# Altium PCB MCU48PIN.PcbDoc
Units mm, origin at the board's own origin, x right, y up, seen from the top; angles counter-clockwise.
Board outline 63.12 x 33.27 mm, 2 copper layers (Top Layer, Bottom Layer); 49 components, 63 nets, 196 pads, 55 vias.
Unrouted connection lines stored in the file: 13.
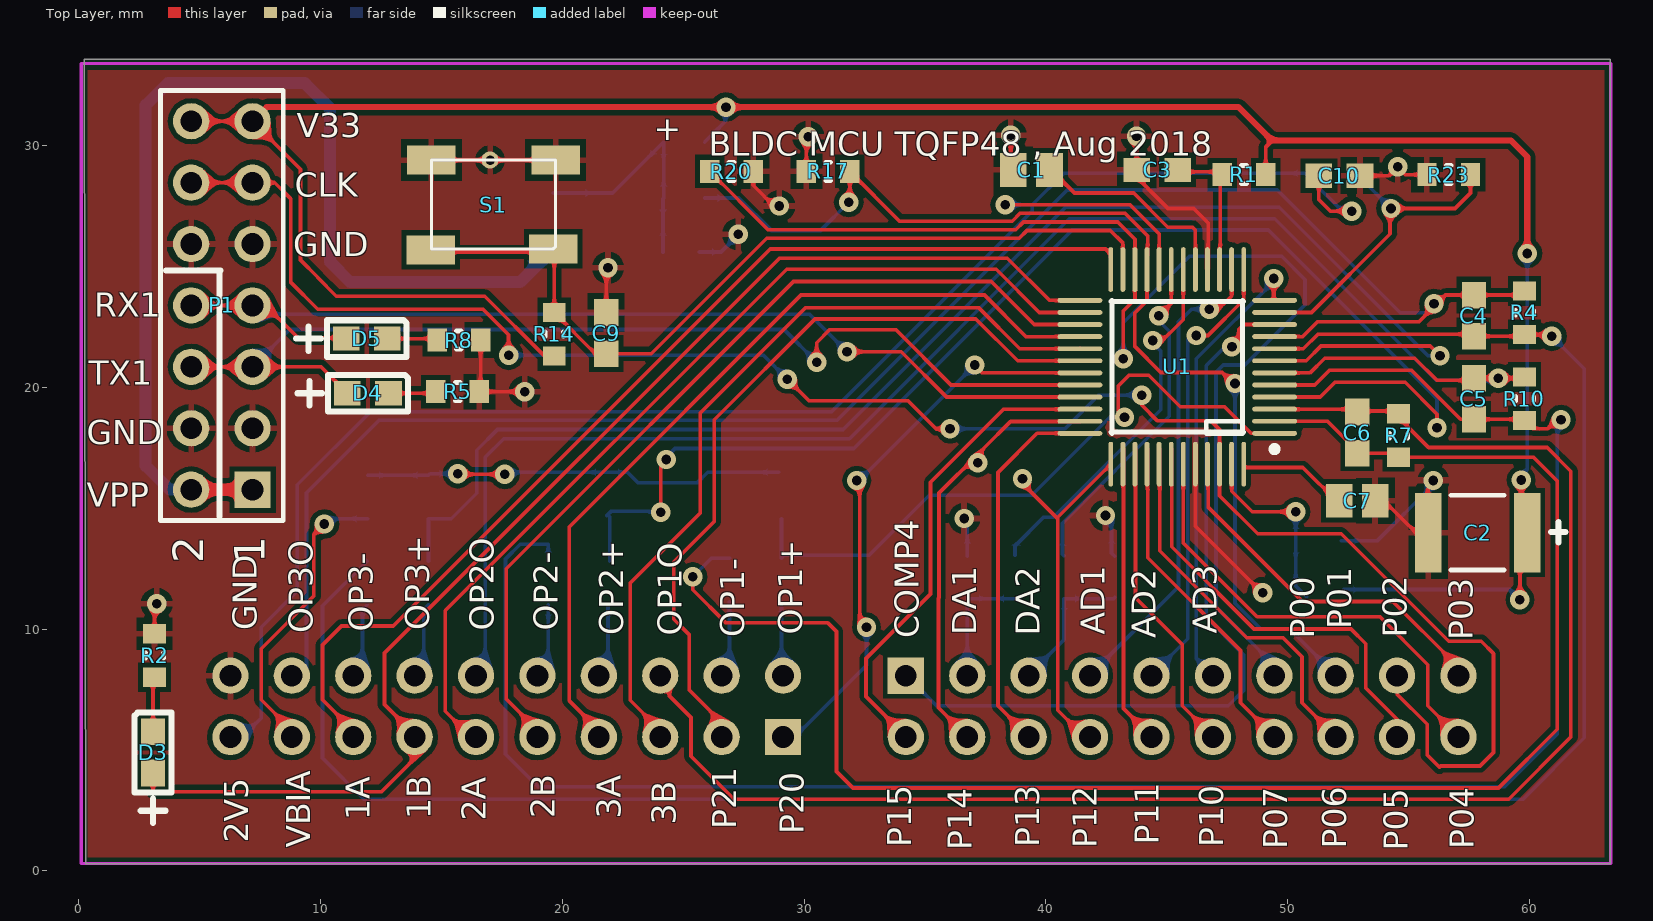
[diagram p0: Top Layer view]
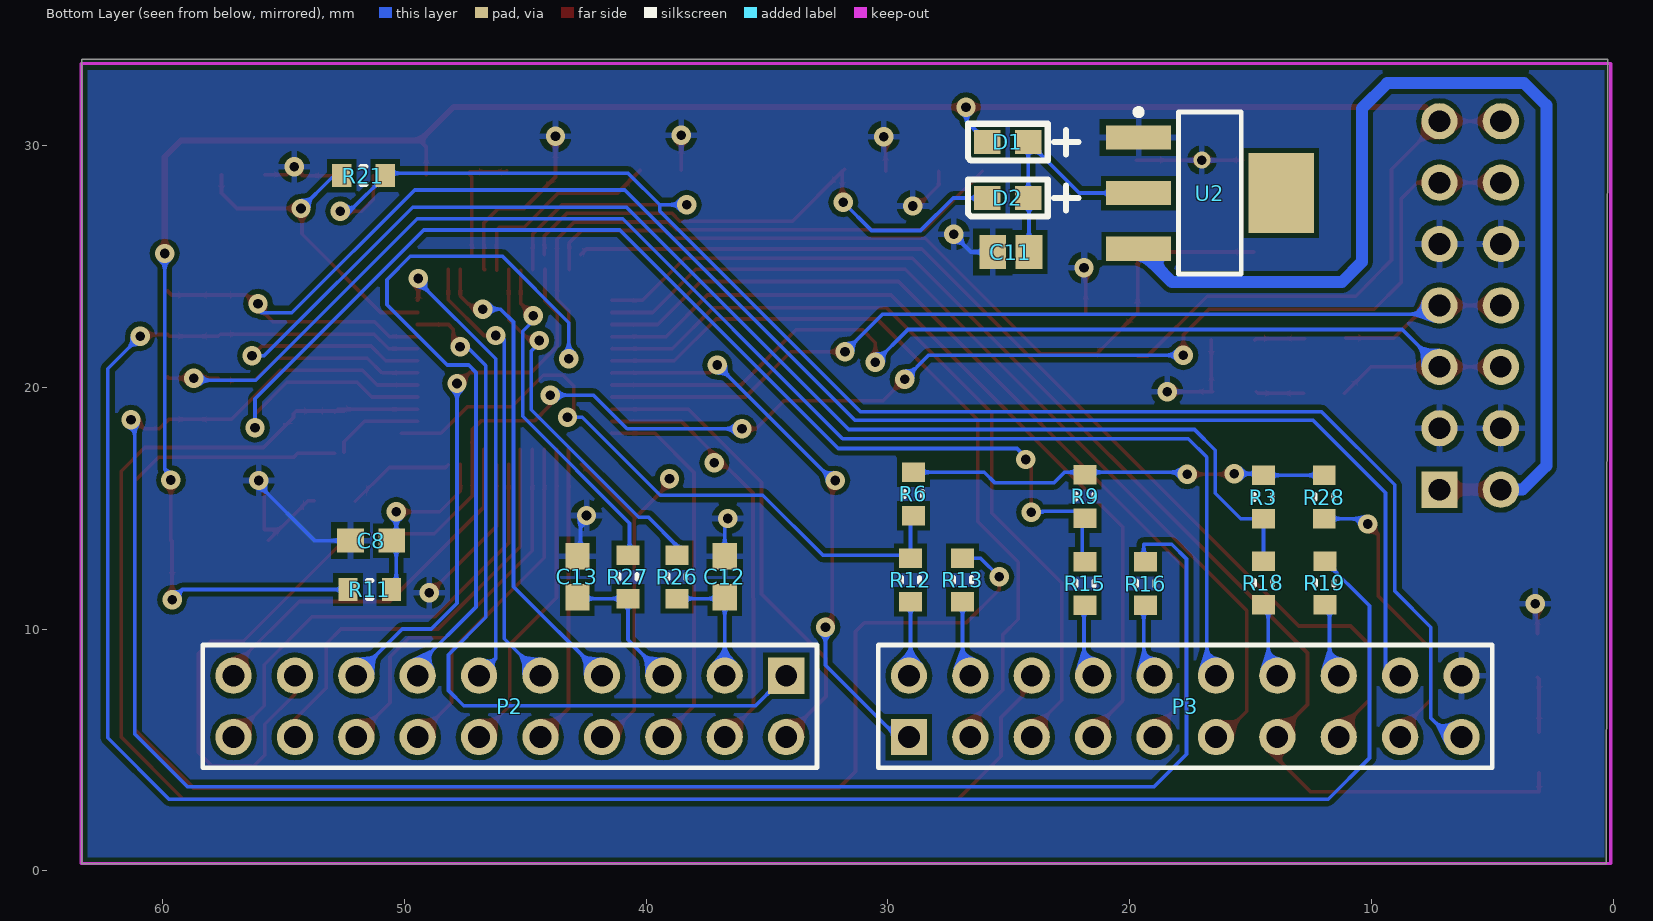
[diagram p1: Bottom Layer view, seen from below]

## Layer stack, top to bottom
Top Solder: solder mask 0.0102, Solder Resist, Dk 3.5
Top Layer: signal copper 0.0356
Dielectric1: dielectric 0.32, FR-4, Dk 4.8
Bottom Layer: signal copper 0.0356
Bottom Solder: solder mask 0.0102, Solder Resist, Dk 3.5

## Board outline
0.229,33.579 63.348,33.579 63.348,0.305 0.279,0.305

## Design rules (kind name [scope] priority, off if disabled: settings)
Clearance [All] p1: gap=0.203 ignorepadtopadclearanceinfootprint=FALSE
FabricationTestPointUsage TestPointUsage [All] p1: valid=0 allowmultiple=FALSE
FabricationTestpoint Testpoint [All] p1: side=3 testpointundercomponent=TRUE minsize=1.016 maxsize=2.54 preferedsize=1.524 minholesize=0 maxholesize=1.016 preferedholesize=0.813 testpointgrid=0.025 allowsidetop=TRUE allowsidebottom=TRUE usegrid=TRUE gridtolerance=0
PolygonConnect [All] p1: connectstyle=Relief reliefconductorwidth=0.254 reliefentries=4 polygonreliefangle="90 Angle" airgapwidth=0.254
RoomDefinition MCU48pin [InComponentClass('MCU48pin')] p1: confinementstyle=ConfineIn formatcopy=TRUE lockcomponents=FALSE outline 0.203,0.305 63.551,0.305 63.551,33.579 0.203,33.579
RoutingVias [All] p1: holewidth=0.4 width=0.8 viastyle="Through Hole" minholewidth=0.4 minwidth=0.8 maxholewidth=0.711 maxwidth=1.27
SilkToSolderMaskClearance SilkscreenOverComponentPads [IsPad] p1: minsilkscreentomaskgap=0.254 clearancetoexposedcopper=TRUE
SolderMaskExpansion [All] p1: expansion=0.102
Width [All] p1: maxlimit=0.508 minlimit=0.152 preferedwidth=0.152 minimp=50.000000 maximp=50.000000 favimp=50.000000
27 further rules are at their usual default settings.

## Components (designator, comment, footprint, x,y, rotation, side; value= is the part's Value field where it differs from the comment)
C1 "4.7u" C0805 39.407,29 r0 top
C2 "Tan-cap" R1206w 57.869,13.487 r180 top value=100uF
C3 "0.1u" 1608[0603] 44.607,29 r180 top
C4 "NC" 1608[0603] 57.709,22.973 r270 top
C5 "NC" 1608[0603] 57.709,19.533 r270 top
C6 "NC" 1608[0603] 52.883,18.136 r270 top
C7 "4.7u" C0805 52.883,15.316 r180 top
C8 "0.1u" 1608[0603] 51.384,13.665 r0 bottom
C9 "4.7U" 1608[0603] 21.819,22.25 r90 top
C10 "0.1u" 1608[0603] 52.149,28.76 r0 top
C11 "4.7u" C0805 24.917,25.603 r180 bottom
C12 "150p" 1608[0603] 36.754,12.167 r90 bottom
C13 "150p" 1608[0603] 42.85,12.167 r90 bottom
D1 "Diode 11DQ03" D0603 25.044,30.15 r0 bottom
D2 "Diode 11DQ03" D0603 25.044,27.838 r0 bottom
D3 "LED" D0603 3.073,4.902 r90 top
D4 "LED" D0603 11.963,19.761 r0 top
D5 "LED" D0603 11.913,22.022 r0 top
P1 "Header 7X2" HDR2X7 7.188,15.773 r90 top locked
P2 "Header 10X2A" HDR2X10_CEN 34.214,8.077 r0 bottom locked
P3 "Header 10X2A" HDR2X10_CEN 29.134,5.537 r180 bottom locked
R1 "FB" R0603 48.707,28.864 r270 top
R2 "10k" R0603 3.073,9.423 r0 top
R3 "1K" R0603 14.529,15.977 r180 bottom
R4 "10k" R0603 59.741,23.597 r0 top
R5 "10k" R0603 16.18,19.888 r270 top
R6 "1K" R0603 29.007,16.104 r180 bottom
R7 "10k" R0603 54.534,18.517 r0 top
R8 "10k" R0603 16.231,22.022 r270 top
R9 "1K" R0603 21.907,16 r180 bottom
R10 "10k" R0603 59.741,20.041 r0 top
R11 "FB" R0603 51.943,11.582 r90 bottom
R12 "1K" R0603 29.127,12.548 r180 bottom
R13 "1K," R0603 26.975,12.548 r180 bottom
R14 "10k" R0603 19.609,22.708 r0 top
R15 "1K" R0603 21.907,12.4 r180 bottom
R16 "1K," R0603 19.407,12.4 r180 bottom
R17 "10K" R0603 31.507,29 r270 top
R18 "1K" R0603 14.529,12.421 r180 bottom
R19 "1K," R0603 11.989,12.421 r180 bottom
R20 "10k" R0603 27.507,29 r270 top
R21 "10k" R0603 52.207,28.7 r90 bottom
R23 "10k" R0603 56.16,28.744 r90 top
R26 "15" R0603 38.786,12.675 r180 bottom
R27 "15" R0603 40.818,12.675 r180 bottom
R28 "NC" R0603 11.894,14.961 r0 bottom
S1 "SW-PB" SW 17.094,27.762 r0 top
U1 "MCU" TSSOP48 45.745,20.066 r180 top
U2 "LDO" SOT223_M 16.684,28.042 r180 bottom

## Footprints (in the part's own frame and the unit in brackets; to place one, negate y for a bottom-side part, rotate by r counter-clockwise, add the part's x,y. Pads: shape width x height; smd on the part's side, far side on the other; paste and mask are expansions set on the pad)
1608[0603] [mm] "Chip Capacitor; Body 1.6 x 0.8 mm (LxW typ)"
  rect 1.1x1 smd: 1(-0.85,0) 2(0.85,0)
C0805 [mm] "Chip Capacitor, Body 2.0x1.3mm, IPC High Density"
  rect 1.1x1.4 smd: 1(-0.75,0) 2(0.75,0)
  body extent -1.1,-0.72 1.1,0.72, height 1.4
D0603 [mm]
  rect 1.1x1 smd: 1(-0.85,0) 2(0.85,0)
  silkscreen extent -2.92,-0.76 1.65,0.76
HDR2X7 [mm] "Connector; Header; 7x2 Position"
  rect 1.5x1.5 hole 0.9: 1(0,0)
  round 1.5 hole 0.9: 2(0,2.54) 3(2.54,0) 4(2.54,2.54) 5(5.08,0) 6(5.08,2.54) 7(7.62,0) 8(7.62,2.54) 9(10.16,0) 10(10.16,2.54) 11(12.7,0) 12(12.7,2.54) 13(15.24,0) 14(15.24,2.54)
  silkscreen extent -1.27,-1.27 16.51,3.81
HDR2X10_CEN [mm] "Connector; Header; 10x2 Position"
  rect 1.5x1.5 hole 0.9: 1(0,0)
  round 1.5 hole 0.9: 2(2.54,0) 3(5.08,0) 4(7.62,0) 5(10.16,0) 6(12.7,0) 7(15.24,0) 8(17.78,0) 9(20.32,0) 10(22.86,0) 11(0,2.54) 12(2.54,2.54) 13(5.08,2.54) 14(7.62,2.54) 15(10.16,2.54) 16(12.7,2.54) 17(15.24,2.54) 18(17.78,2.54) 19(20.32,2.54) 20(22.86,2.54)
  silkscreen extent -1.27,-1.27 24.13,3.81
R0603 [mm]
  rect 0.95x0.8 smd: 1(0.06,0.392) 2(0.06,-1.408)
  silkscreen extent -0.32,-0.61 0.44,-0.41, body extent -0.39,-1.36 0.51,0.34, height 0.6
R1206w [mm]
  rect 1.1x3.3 smd: 1(-2.05,-0.508) 2(2.05,-0.508)
  silkscreen extent -1.1,-2.06 1.1,1.04, body extent -2.4,-2.21 2.4,1.19, height 0.7
SOT223_M [mm] "SOT223, 4-Leads, Body 6.5x3.5mm, Pitch 2.3mm, Lead Span 7mm, IPC Low Density"
  rect 2.7x1 smd: 1(-2.95,2.3) 2(-2.95,0) 3(-2.95,-2.3)
  rect 2.7x3.3 smd: 4(2.95,0)
  silkscreen extent -3.08,-3.35 1.3,3.47, body extent -1.85,-3.35 1.85,3.35, height 1.7
SW [mm]
  rect 2x1.2 smd: 1(-2.507,1.643) 1(2.634,1.643) 2(-2.532,-2.065) 2(2.533,-2.029)
  silkscreen extent -2.51,-2.04 2.63,1.64, body extent -2.51,-2.04 2.35,1.64, height 0.5
TSSOP48 [mm]
  oval 1.85x0.2 smd: 1(-3.72,1.963) 2(-3.72,1.463) 3(-3.72,0.963) 4(-3.72,0.463) 5(-3.72,-0.037) 6(-3.72,-0.537) 7(-3.72,-1.037) 8(-3.72,-1.537) 9(-3.72,-2.037) 10(-3.72,-2.537) 11(-3.72,-3.037) 12(-3.72,-3.537) 25(4.33,-3.537) 26(4.33,-3.037) 27(4.33,-2.537) 28(4.33,-2.037) 29(4.33,-1.537) 30(4.33,-1.037) 31(4.33,-0.537) 32(4.33,-0.037) 33(4.33,0.463) 34(4.33,0.963) 35(4.33,1.463) 36(4.33,1.963)
  oval 0.2x1.85 smd: 13(-2.445,-4.812) 14(-1.945,-4.812) 15(-1.445,-4.812) 16(-0.945,-4.812) 17(-0.445,-4.812) 18(0.055,-4.812) 19(0.555,-4.812) 20(1.055,-4.812) 21(1.555,-4.812) 22(2.055,-4.812) 23(2.555,-4.812) 24(3.055,-4.812) 37(3.055,3.238) 38(2.555,3.238) 39(2.055,3.238) 40(1.555,3.238) 41(1.055,3.238) 42(0.555,3.238) 43(0.055,3.238) 44(-0.445,3.238) 45(-0.945,3.238) 46(-1.445,3.238) 47(-1.945,3.238) 48(-2.445,3.238)
  silkscreen extent -3.85,-3.54 3.05,2.74, body extent -3.38,-4.16 3.62,2.84, height 1

## Part data
C1 C3 C4 C5 C6 C7 C8 C9 C10 C11 C12 C13: library part "CAP NP", "CAP NL", manufacturer=Yageo, part number=CC0603KRX7R9BB103, remark="C-CAP 10N 50V X7R  0603 K"
C2: library part "Cap Pol1", "Polarized Capacitor (Radial)", LatestRevisionDate=17-Jul-2002, LatestRevisionNote="Re-released for DXP Platform.", PackageReference=RB7.6-15, Published=8-Jun-2000, Publisher="Altium Limited"
D1 D2: "Schottky Rectifier", Code_JEDEC=DO-204-AL, ComponentLink1Description="Manufacturer Link", ComponentLink1URL=http://www.irf.com/, ComponentLink2Description=Datasheet, ComponentLink2URL=http://www.irf.com/product-info/datasheets/data/11dq03.pdf, DatasheetVersion=Dec-1997, LatestRevisionDate=17-Jul-2002, LatestRevisionNote="Re-released for DXP Platform.", PackageDescription="Diode, Axial; Body 5.2 x 2.7 mm (LxDia. max), Lead Dia. 0.86 mm (max)", PackageReference=DO-204AL, Published=8-Jun-2000, Publisher="Altium Limited"
D3 D4 D5: library part LED2, "Typical RED, GREEN, YELLOW, AMBER GaAs LED", LatestRevisionDate=17-Jul-2002, LatestRevisionNote="Re-released for DXP Platform.", PackageDescription="SM LED; 2 Flat Leads", PackageReference=3.2X1.6X1.1, PackageVersion=Feb-2002, Published=8-Jun-2000, Publisher="Altium Limited"
P1: "Header, 7-Pin, Dual row", LatestRevisionDate=17-Jul-2002, LatestRevisionNote="Re-released for DXP Platform.", Publisher="Altium Limited"
P2 P3: "Header, 10-Pin, Dual row", LatestRevisionDate=17-Jul-2002, LatestRevisionNote="Re-released for DXP Platform.", Publisher="Altium Limited"
R1 R2 R3 R4 R5 R6 R7 R8 R9 R10 R11 R12 R13 R14 R15 R16 R17 R18 R19 R20 R21 R23 R26 R27 R28: library part RES, "RES", manufacturer=Yageo, part number=RC0603JR-071KL, remark="RES-TF 1K  0.1W 0603 5%"
S1: "Switch", LatestRevisionDate=17-Jul-2002, LatestRevisionNote="Re-released for DXP Platform.", PackageReference=SPST-2, Published=24-Mar-1999, Publisher="Altium Limited"

## Via types
v1: diameter 0.8, hole 0.4, Top Layer to Bottom Layer, tented both sides, 54 vias
v2: diameter 0.7, hole 0.4, Top Layer to Bottom Layer, tented both sides, 1 vias

## Nets (pads, with @x,y where several pads share a name; then routed paths per layer and width w, separated by ;. In a path a pad name is that pad's centre, name@x,y a point inside that pad or via, vN(x,y) a via of type N, cw(c..) or ccw(c..) an arc to the next point about the centre after c; other vN are vias at no path point)
5V: P1.1 P1.2 U2.3 | length 44.7
  Top Layer w0.5: P1.2 P1.1
  Bottom Layer w0.5: P1.2 3.759,15.773 2.769,16.764 2.769,31.674 3.683,32.588 9.347,32.588 10.389,31.547 10.389,25.197 11.227,24.359 18.251,24.359 U2.3
AD1: P2.4 U1.14 | length 20
  Top Layer w0.152: v1(46.761,23.241) 46.952,23.05 47.691,23.789 U1.14
  Bottom Layer w0.152: P2.4@41.834,8.103 45.491,11.76 45.491,22.708 46.025,23.241 v1(46.761,23.241)
AD2: P2.5 U1.13 | length 19
  Top Layer w0.152: v1@46.406,21.971 v1(46.228,22.149) 46.711,22.149 48.191,23.629 U1.13
  Bottom Layer w0.152: P2.5@44.374,8.103 45.872,9.601 45.872,21.996 46.025,22.149 v1(46.228,22.149)
AD3: P2.6 U1.12 | length 18.9
  Top Layer w0.152: v1(49.428,24.511) 49.428,23.641 U1.12
  Bottom Layer w0.152: P2.6@46.914,8.103 46.228,8.788 46.228,21.184 49.428,24.384 v1(49.428,24.511)
AVDD25: C10.1 P3.10 R21.2 U1.20 | length 73.2
  Top Layer w0.152: v1(38.329,27.559) 43.485,27.559 44.691,26.353 U1.20 ; C10.1 51.299,27.763 51.766,27.296 v1(52.655,27.296)
  Bottom Layer w0.152: P3.10@6.655,5.436 7.544,6.325 7.544,10.084 9.042,11.582 9.042,15.971 12.07,18.999 31.14,18.999 39.446,27.305 39.446,27.559 ; v1(38.329,27.559) 39.446,27.559 ; R21.2 52.262,27.296 v1(52.655,27.296) ; R21.2@50.799,28.864 40.751,28.864 39.446,27.559
COMP4: P2.1 U1.10 | length 32.6
  Top Layer w0.152: v1(47.701,21.692) 47.981,21.971 47.981,22.403 48.181,22.603 U1.10
  Bottom Layer w0.152: P2.1@34.214,8.103 35.484,6.833 47.549,6.833 48.184,7.468 48.184,8.942 46.634,10.491 46.634,20.904 47.422,21.692 v1(47.701,21.692)
DA1/AD8: C12.1 P2.2 R26.2 | length 5.2
  Bottom Layer w0.152: P2.2@36.754,8.103 C12.1 36.804,11.267 R26.2
DA2/AD9: C13.1 P2.3 R27.2 | length 5.9
  Bottom Layer w0.152: P2.3@39.294,8.103 40.758,9.567 R27.2 42.8,11.267 C13.1
GND: C1.1 C2.2 C3.2 C7.1 C8.2 C9.2 C10.2 C11.1 C12.2 C13.2 P1.3 P1.4 P1.9 P1.10 P3.20 R2.1 R5.1 R8.1 R17.2 R20.1 R23.1 S1.1 U1.16 U1.44 U2.1 | length 49.1
  Top Layer w0.152: R2.1 3.133,10.957 v1(3.226,11.049) ; S1.1@15.331,29.405 v2(17.015,29.405) S1.1@19.728,29.405 ; R8.1 16.623,19.879 R5.1 v1(18.45,19.828) ; C9.2 21.819,24.663 v1@21.996,24.841 ; R20.1 27.899,28.362 28.753,27.508 v1(28.981,27.508) ; R17.2 30.099,30.251 30.175,30.328 v1(30.175,30.378) ; C1.1@38.557,29 v1(38.557,30.429) ; v1@43.713,30.429 v1(43.757,30.386) C3.2 43.757,28.709 45.06,27.407 46.126,27.407 46.716,26.817 46.716,24.904 U1.16 ; U1.44@46.191,16.803 46.191,14.261 48.946,11.506 v1(48.971,11.506) ; C10.2 54.194,28.76 v1(54.56,29.125) 54.881,28.804 R23.1 ; C7.1@53.733,15.316 53.992,15.316 55.186,14.122 ; C2.2@55.626,13.682 55.186,14.122 ; v1(56.032,16.154) 56.032,16.027 55.804,15.799 55.804,14.122 55.186,14.122
  Bottom Layer w0.152: C11.1 26.568,25.603 v1@27.28,26.314 ; v1(27.28,26.34) v1@27.28,26.314 ; v1@27.305,26.34 v1@27.28,26.314 ; v1(36.627,14.58) 36.627,14.326 36.754,14.199 C12.2 ; v1(42.469,14.707) 42.723,14.453 42.723,13.144 C13.2 ; v1(48.971,11.506) v1@49.047,11.506 ; C8.2 53.721,13.665 56.032,15.977 v1(56.032,16.154)
  other v1: 21.895,24.952
I2C_CLK: P2.16 U1.39 | length 13.2
  Top Layer w0.152: U1.39@43.716,17.438 43.716,11.3 45.644,9.373 45.644,6.833 P2.16@46.914,5.563
I2C_SDA: P2.15 U1.38 | length 12.4
  Top Layer w0.152: U1.38@43.216,17.438 43.216,9.26 43.216,6.72 P2.15@44.374,5.563
MISO: P2.14 U1.37 | length 15.4
  Top Layer w0.152: v1(39.04,16.231) 39.04,16.032 40.467,14.605 40.493,14.63 ; P2.14@41.834,5.563 41.58,5.563 40.493,6.65 40.493,14.63 ; U1.37 40.493,14.63
  Bottom Layer w0.152: v1@38.837,16.027 v1(39.04,16.231)
MOSI: P2.13 U1.36 | length 15.5
  Top Layer w0.152: P2.13@39.294,5.563 38.024,6.833 38.024,16.485 39.643,18.103 U1.36 U1.36@41.427,18.115
NetC1_2: C1.2 U1.17 | length 9.6
  Top Layer w0.152: C1.2@40.257,28.974 41.189,28.042 43.637,28.042 45.051,26.628 46.067,26.628 46.191,26.504 46.191,24.853 46.191,25.869
NetC3_1: C3.1 R1.2 U1.15 | length 4.9
  Top Layer w0.152: C3.1@45.771,28.97 45.821,28.92 R1.2@47.299,28.92 ; U1.15@47.216,25.488 47.216,28.273 47.216,28.721 R1.2
NetC4_2: C4.2 R4.2 R19.1 U1.8 | length 91.9
  Top Layer w0.152: U1.8@49.473,21.596 U1.8 50.655,21.603 51.257,22.206 57.625,22.206 C4.2 R4.2@59.735,22.123 ; R4.2 60.869,22.189 v1(60.935,22.123)
  Bottom Layer w0.152: R19.1@11.802,12.94 R19.1 10.084,10.968 10.084,4.674 11.786,2.972 59.741,2.972 62.281,5.512 62.281,20.777 v1(60.935,22.123)
NetC5_2: C5.2 R10.2 R16.1 U1.5 | length 81.6
  Top Layer w0.152: U1.5 51.13,20.103 51.74,20.713 55.131,20.713 57.162,18.683 C5.2 59.751,18.683 R10.2 60.145,18.288 60.757,18.288 v1@61.011,18.542
  Bottom Layer w0.152: R16.1@19.422,12.813 19.422,13.513 18.263,13.513 17.653,12.903 17.653,4.826 18.999,3.48 58.979,3.48 61.163,5.664 61.163,18.39 v1@61.011,18.542
  other v1: 61.316,18.669
NetC6_2: C6.2 R7.2 R13.1 U1.2 | length 68.8
  Top Layer w0.152: v1(25.4,12.167) 25.4,11.633 26.772,10.262 30.988,10.262 31.344,9.906 31.344,4.115 32.029,3.429 58.725,3.429 61.163,5.867 61.163,16.129 60.184,17.109 R7.2 54.417,17.286 C6.2 ; U1.2 51.653,18.603 52.502,17.755 C6.2@52.502,17.325
  Bottom Layer w0.152: v1(25.4,12.167) 26.173,12.94 R13.1
NetC7_2: C7.2 U1.48 | length 4.5
  Top Layer w0.152: U1.48@48.191,16.803 48.306,16.688 50.636,16.688 C7.2@52.033,15.291
NetC8_1: C8.1 R11.2 U1.47 | length 7.8
  Top Layer w0.152: U1.47 47.691,15.708 48.539,14.859 v1(50.343,14.859)
  Bottom Layer w0.152: v1(50.343,14.859) 50.343,11.786 R11.2@50.786,11.342
NetD3_2: D3.2 R2.2 | length 2.3
  Top Layer w0.152: D3.2 3.073,7.955 R2.2
NetD4_2: D4.2 R5.2 | length 2
  Top Layer w0.152: D4.2 14.705,19.761 R5.2
NetD5_2: D5.2 R8.2 | length 2.1
  Top Layer w0.152: D5.2 14.763,22.022 R8.2
NetR3_1: R3.1 R6.1 R9.1 R28.2 | length 17.4
  Top Layer w0.152: v1(15.672,16.434) 15.697,16.408 v1(17.628,16.408)
  Bottom Layer w0.152: R28.2 R3.1 14.534,16.434 v1(15.672,16.434) ; v1(17.628,16.408) 17.711,16.492 19.347,16.492 ; 19.391,16.496 22.697,16.496 23.139,16.053 25.578,16.053 26.021,16.496 R6.1
NetR3_2: R3.2 R18.1 U1.7 | length 59.8
  Top Layer w0.152: U1.7 50.775,21.103 51.384,21.713 55.909,21.713 v1(56.312,21.311)
  Bottom Layer w0.152: R18.1 R3.2 15.407,14.569 16.459,15.621 16.459,17.399 17.323,18.263 31.623,18.263 40.818,27.457 49.662,27.457 55.809,21.311 v1(56.312,21.311)
NetR6_2: R6.2 R12.1 U1.1 | length 27.9
  Top Layer w0.152: v1(43.256,18.771) 43.002,19.025 43.002,20.066 43.44,20.504 44.266,20.504 45.568,19.202 47.396,19.202 48.495,18.103 U1.1 U1.1@50.121,18.103
  Bottom Layer w0.152: R6.2@29.067,14.576 R12.1 29.187,13.06 32.694,13.06 35.179,15.545 39.421,15.545 42.647,18.771 v1(43.256,18.771)
NetR9_2: R9.2 R15.1 U1.4 | length 54.5
  Top Layer w0.152: v1(24.079,14.834) 24.079,16.789 v1(24.308,17.018) ; U1.4 51.353,19.603 51.963,20.213 54.869,20.213 56.185,18.898 v1(56.185,18.339)
  Bottom Layer w0.152: R9.2@21.835,14.696 22.014,14.874 23.612,14.874 ; R15.1@21.962,12.813 R9.2@21.962,14.647 ; 23.612,14.834 v1(24.079,14.834) ; v1(24.308,17.018) 24.308,17.12 24.663,17.475 32.055,17.475 41.097,26.518 49.2,26.518 56.185,19.533 v1(56.185,18.339)
NetR21_1: R21.1 R23.2 U1.11 | length 13.4
  Top Layer w0.152: U1.11 50.993,23.103 54.246,26.356 54.238,26.356 54.238,27.449 v1(54.28,27.407) 56.931,27.407 57.568,28.044 R23.2
  Bottom Layer w0.152: 53.01,28.677 v1(54.28,27.407)
NetR26_1: R26.1 U1.18 | length 15.6
  Top Layer w0.152: v1(44.425,21.946) 44.628,21.742 45.691,22.805 U1.18
  Bottom Layer w0.152: R26.1 38.726,13.448 39.908,14.63 40.31,14.63 44.755,19.075 44.755,21.514 44.425,21.844 v1(44.425,21.946)
NetR27_1: R27.1 U1.19 | length 14.1
  Top Layer w0.152: v1(44.679,22.962) 45.191,23.474 U1.19@45.191,24.853
  Bottom Layer w0.152: R27.1@40.758,13.041 40.691,13.108 40.691,14.387 45.11,18.807 45.11,22.327 44.679,22.758 v1(44.679,22.962)
OP1+: P3.11 R12.2 | length 3.3
  Bottom Layer w0.152: R12.2 29.067,8.424 P3.11@29.515,7.976
OP1-: P3.12 R13.2 | length 3.2
  Bottom Layer w0.152: R13.2 26.915,8.036 P3.12@26.975,7.976
OP1O: C6.1 P3.13 R7.1 U1.3 | length 67
  Top Layer w0.152: P3.13@24.435,8.382 24.435,7.239 25.324,6.35 25.324,4.75 27.102,2.972 59.157,2.972 61.722,5.537 61.722,16.535 60.74,17.517 55.838,17.517 54.594,18.761 R7.1 54.478,19.025 C6.1@52.844,19.025 ; U1.3 52.765,19.103 C6.1@52.844,19.025 ; C6.1@52.502,19.025 C6.1@52.844,19.025 ; C6.1 C6.1@52.844,19.025
OP2+: P3.14 R15.2 | length 3.1
  Bottom Layer w0.152: P3.14@21.895,7.976 21.895,10.946 R15.2@21.962,11.013
OP2-: P3.15 R16.2 | length 3.1
  Bottom Layer w0.152: P3.15@19.355,7.976 19.422,8.043 R16.2@19.422,11.013
OP2O: C5.1 P3.16 R10.1 U1.6 | length 69.1
  Top Layer w0.152: U1.6 50.927,20.603 51.537,21.213 55.266,21.213 56.185,20.295 57.621,20.295 C5.1 v1(58.725,20.383) R10.1@59.751,20.383 ; R10.1@59.751,20.383 R10.1 59.801,20.413 59.77,20.383 R10.1@59.751,20.383
  Bottom Layer w0.152: P3.16@16.815,7.976 16.815,17.12 17.577,17.882 31.877,17.882 40.97,26.975 49.475,26.975 56.155,20.295 58.655,20.295 58.725,20.365 v1(58.725,20.383)
OP3+: P3.17 R18.2 | length 3.1
  Bottom Layer w0.152: P3.17@14.275,7.976 14.275,10.819 R18.2
OP3-: P3.18 R19.2 | length 3.1
  Bottom Layer w0.152: P3.18@11.735,7.976 11.735,10.819 R19.2
OP3O: C4.1 P3.19 R4.1 U1.9 | length 73.1
  Top Layer w0.152: U1.9 50.622,22.103 51.232,22.713 55.428,22.713 56.538,23.823 C4.1 59.635,23.823 R4.1
  Bottom Layer w0.152: P3.19@9.195,7.976 9.423,8.204 9.423,15.646 12.421,18.644 31.369,18.644 40.894,28.169 49.581,28.169 54.661,23.089 55.931,23.089 56.058,23.216 v1(56.058,23.47)
P00: P2.7 R20.2 U1.22 | length 54.1
  Top Layer w0.152: R20.2 28.514,26.524 38.757,26.524 39.081,26.848 42.979,26.848 43.691,26.137 U1.22 43.691,23.65 43.205,23.165 v1(43.205,21.184)
  Bottom Layer w0.152: v1(43.205,21.184) 43.205,22.682 45.949,25.425 49.759,25.425 50.724,24.46 50.724,23.419 48.235,20.93 47.346,20.93 47.041,20.625 47.041,10.922 49.454,8.509 P2.7@49.454,8.103
P01/M1: D2.2 P2.8 R17.1 U1.21 | length 45.8
  Top Layer w0.152: R17.1@31.801,29.032 R17.1@31.899,28.934 ; v1(31.852,27.661) 31.899,27.708 R17.1@31.899,28.934 ; R17.1 R17.1@31.899,28.934 ; U1.21 44.191,23.591 43.688,23.089 43.688,21.692 44.761,20.618 47.301,20.618 47.752,20.168 v1(47.828,20.168) ; U1.21@44.216,25.488 44.216,26.264 43.276,27.203 38.934,27.203 38.61,26.88 33.953,26.88 R17.1@31.899,28.934
  Bottom Layer w0.152: D2.2 27.305,27.838 28.651,26.492 30.683,26.492 v1(31.852,27.661) ; v1@47.625,20.168 v1(47.828,20.168) 47.828,11.074 48.895,10.008 50.089,10.008 P2.8@51.994,8.103
P02: P1.11 P1.12 P2.9 U1.46 | length 78.6
  Top Layer w0.152: P1.12 P1.11 8.103,28.473 8.763,27.813 8.763,24.359 9.881,23.241 16.718,23.241 17.78,22.179 v1(17.78,21.336) ; v1(29.312,20.345) 30.201,19.456 34.29,19.456 35.458,18.288 v1(36.043,18.288) ; v1(43.967,19.685) 43.967,19.279 44.628,18.618 46.838,18.618 47.191,18.265 U1.46 47.191,15.522 48.768,13.945 52.222,13.945 56.667,9.5 58.014,9.5 58.522,8.992 58.522,4.902 57.963,4.343 56.337,4.343 56.286,4.293 55.778,4.801 55.778,6.071 54.534,7.315 P2.9 P2.9@54.534,8.103
  Bottom Layer w0.152: v1(17.78,21.336) 28.321,21.336 v1(29.312,20.345) ; v1(36.043,18.288) 40.792,18.288 42.189,19.685 v1(43.967,19.685)
P03: P2.10 U1.45 | length 15.8
  Top Layer w0.152: U1.45@46.716,17.438 46.716,15.057 50.622,11.151 54.356,11.151 56.832,8.674 56.832,8.344 P2.10@57.074,8.103
P04/RX2: P2.20 U1.43 | length 19
  Top Layer w0.152: U1.43 45.691,13.568 48.743,10.516 53.823,10.516 55.804,8.535 55.804,6.833 P2.20@57.074,5.563
P05/TX2: P2.19 U1.42 | length 18.1
  Top Layer w0.152: U1.42@45.216,17.438 45.216,13.407 48.616,10.008 52.629,10.008 53.238,9.398 53.238,7.569 54.534,6.274 P2.19@54.534,5.563
P06: P2.18 U1.41 | length 16.4
  Top Layer w0.152: U1.41@44.716,17.438 44.716,13.247 48.313,9.65 49.812,9.65 50.597,8.865 50.597,7.976 ; 50.597,7.341 50.597,7.976 ; P2.18@51.994,5.563 50.597,6.96 50.597,7.976
P07: P2.17 U1.40 | length 14
  Top Layer w0.152: U1.40@44.216,17.438 44.216,12.959 48.057,9.119 48.057,6.96 P2.17@49.454,5.563
P20: P3.1 U1.31 | length 24.8
  Top Layer w0.152: v1(32.182,16.154) v1@32.309,16.154 ; v1@32.309,16.434 v1@32.309,16.154 ; v1(32.588,10.084) 32.766,10.262 32.766,9.855 32.309,10.312 v1@32.309,16.154 ; v1(37.059,20.93) 37.385,20.603 U1.31 U1.31@41.432,20.587
  Bottom Layer w0.152: P3.1@29.515,5.436 32.588,8.509 v1(32.588,10.084) ; v1(32.182,16.154) 32.283,16.154 v1(37.059,20.93)
P21: P3.2 U1.30 | length 32.5
  Top Layer w0.152: P3.2@26.975,5.436 26.975,5.766 25.248,7.493 25.248,9.779 24.613,10.414 24.613,12.776 26.289,14.453 26.289,18.669 30.455,22.835 37.109,22.835 38.84,21.103 U1.30
P22/PWM3B: P3.3 U1.29 | length 33.6
  Top Layer w0.152: P3.3@24.435,5.436 22.809,7.061 22.809,11.913 25.705,14.808 25.705,18.948 30.048,23.292 37.236,23.292 38.925,21.603 U1.29 U1.29@41.41,21.609
P23/PWM3A: P3.4 U1.28 | length 35.3
  Top Layer w0.152: P3.4@21.895,5.436 20.295,7.036 20.295,14.24 29.88,23.825 37.465,23.825 39.187,22.103 U1.28
P24/PWM2B: P3.5 U1.27 | length 37.2
  Top Layer w0.152: P3.5@19.355,5.436 17.678,7.112 17.678,12.497 29.566,24.384 37.744,24.384 39.525,22.603 U1.27
P25/PWM2A: P3.6 U1.26 | length 39.1
  Top Layer w0.152: P3.6@16.815,5.436 16.332,5.436 15.164,6.604 15.164,10.77 29.286,24.892 37.948,24.892 39.736,23.103 U1.26
P26/PWM1B: D3.1 P3.7 U1.25 | length 53.5
  Top Layer w0.152: D3.1 3.073,3.277 12.522,3.277 14.097,4.851 14.097,5.436 12.649,6.883 12.649,9.017 28.981,25.349 38.405,25.349 40.151,23.603 U1.25
P27/PWM1A: P3.8 U1.24 | length 44.1
  Top Layer w0.152: P3.8@11.735,5.436 10.084,7.087 10.084,9.347 10.871,10.135 13.005,10.135 28.6,25.73 42.474,25.73 U1.24@42.716,25.488
RST: C9.1 R14.1 S1.2 U1.23 | length 34.8
  Top Layer w0.152: S1.2@14.884,25.606 19.482,25.606 19.669,25.419 R14.1 21.368,21.4 C9.1 23.686,21.4 28.454,26.168 38.905,26.168 39.228,26.492 42.672,26.492 43.191,25.974 U1.23
RX1: D5.1 P1.7 P1.8 U1.33 | length 42.9
  Top Layer w0.152: P1.8 P1.7 7.734,23.393 9.08,22.047 D5.1@11.063,22.047 ; v1@31.776,21.632 v1(31.776,21.48) 34.019,21.48 35.896,19.603 U1.33
  Bottom Layer w0.152: P1.7 7.553,23.029 30.226,23.029 v1(31.776,21.48)
SPI_CLK: P2.11 U1.34 | length 19.7
  Top Layer w0.152: P2.11@34.214,5.563 32.563,7.214 32.563,8.788 35.23,11.455 35.23,16.078 38.255,19.103 U1.34
SPI_CS: P2.12 U1.35 | length 18
  Top Layer w0.152: P2.12@36.754,5.563 35.56,6.756 35.56,11.283 35.585,11.308 35.585,15.632 v1@37.186,17.232 ; v1(37.186,16.891) v1@37.186,17.232 ; U1.35 41.405,18.593 38.547,18.593 37.439,17.485 v1@37.186,17.232
TX1: D4.1 P1.5 P1.6 U1.32 | length 44.3
  Top Layer w0.152: P1.6 P1.5 10.021,20.853 D4.1 ; v1(30.523,21.048) 30.523,21.852 31.065,22.394 33.791,22.394 36.081,20.103 U1.32
  Bottom Layer w0.152: P1.5 8.731,22.396 29.174,22.396 v1(30.523,21.048)
V33: C2.1 D1.2 P1.13 P1.14 R1.1 R11.1 R14.2 | length 104.4
  Top Layer w0.152: P1.14 P1.13 9.17,29.032 9.17,25.273 9.881,24.562 9.881,24.546 10.652,23.774 16.789,23.774 19.264,21.3 R14.2 ; v1(26.772,31.598) v1@26.873,31.598 ; R1.1 49.099,29.947 49.363,30.212 ; v1(59.614,11.218) C2.1@59.614,13.656 ; C2.1@59.665,13.656 v1(59.665,16.171)
  Top Layer w0.254: P1.13 7.772,31.598 v1(26.772,31.598) ; v1@26.873,31.598 47.977,31.598 49.363,30.212 59.247,30.212 59.919,29.54 v1(59.919,25.544)
  Bottom Layer w0.152: D1.2 26.746,31.002 26.746,31.623 v1(26.772,31.598) ; R11.1 59.19,11.642 v1(59.614,11.218) ; v1(59.665,16.171) 59.563,16.273 59.919,16.628 v1(59.919,25.544)
V33_PROG: C11.2 D1.1 D2.1 U2.2 | length 10
  Bottom Layer w0.152: U2.2 22.086,28.042 D1.1 D2.1 24.167,27.811 C11.2
VBIAS: P3.9 R28.1 | length 12.6
  Top Layer w0.152: P3.9@9.195,5.436 7.544,7.087 7.544,9.195 9.719,11.37 9.719,13.91 v1(10.16,14.351)
  Bottom Layer w0.152: v1(10.16,14.351) 10.378,14.569 R28.1
pads on no net: U2.4

## Polygon pours and split planes (outlines as drawn)
GND on Bottom Layer "Bottom Layer-GND" (solid, remove dead copper, pour order 10): -1.372,34.696 -0.787,35.281 64.364,35.281 64.364,33.63 64.033,33.299 64.033,-1.346 -1.473,-1.346 -1.6,-1.219 -1.499,-1.118 -1.499,33.757
no net on Bottom Layer "Bottom Layer-No Net 1" (solid, pour order 12): -1.372,33.985
no net on Bottom Layer "Bottom Layer-No Net" (solid, pour order 0): -0.432,34.29
GND on Top Layer "Top Layer-GND" (solid, remove dead copper, pour order 14): -1.27,35.306 -1.016,35.052 64.059,35.052 64.059,-0.787 64.338,-1.067 -0.914,-1.067
no net on Top Layer "Top Layer-No Net" (solid, pour order 8): -14.046,-41.097

## Keep-outs
Keep-Out Layer:
  lines w0.127: 0.102,0.305 63.373,0.305 63.373,33.401 60.935,33.401 0.102,33.401 0.102,0.305

## Silkscreen, mask and mechanical layers (free items; w line width, h text height)
Top Overlay:
  lines w0.254: 3.607,24.841 5.867,24.841 5.817,24.79 5.817,14.656 ; 60.909,14.021 61.493,14.021 ; 61.214,13.589 61.214,14.427
  text "V33" at 9.017,30.353 h1
  text "+" at 23.774,30.226 h1
  text "BLDC MCU TQFP48 , Aug 2018" at 26.06,29.591 h1
  text "CLK" at 8.941,27.889 h1
  text "GND" at 8.865,25.425 h1
  text "RX1" at 0.635,22.936 h1
  text "TX1" at 0.406,20.117 h1
  text "GND" at 0.33,17.653 h1
  text "VPP" at 0.33,15.062 h1
  text "P01" at 52.629,10.008 h1 r90
  text "GND" at 7.366,9.957 h1 r90
  text "OP3+" at 14.503,9.957 h1 r90
  text "OP2O" at 17.17,9.931 h1 r90
  text "OP2-" at 19.812,9.931 h1 r90
  text "OP3-" at 12.167,9.906 h1 r90
  text "OP3O" at 9.677,9.83 h1 r90
  text "AD3" at 47.066,9.804 h1 r90
  text "OP1+" at 29.921,9.779 h1 r90
  text "AD1" at 42.443,9.779 h1 r90
  text "OP2+" at 22.53,9.754 h1 r90
  text "DA1" at 37.135,9.754 h1 r90
  text "OP1O" at 24.943,9.728 h1 r90
  text "DA2" at 39.751,9.728 h1 r90
  text "OP1-" at 27.534,9.677 h1 r90
  text "P02" at 54.94,9.652 h1 r90
  text "COMP4" at 34.747,9.627 h1 r90
  text "AD2" at 44.552,9.627 h1 r90
  text "P00" at 51.105,9.601 h1 r90
  text "P03" at 57.658,9.55 h1 r90
  text "2B" at 19.685,2.184 h1 r90
  text "3A" at 22.428,2.159 h1 r90
  text "1B" at 14.554,2.134 h1 r90
  text "1A" at 12.04,2.108 h1 r90
  text "2A" at 16.84,2.083 h1 r90
  text "3B" at 24.689,1.905 h1 r90
  text "P21" at 27.203,1.727 h1 r90
  text "P20" at 29.997,1.524 h1 r90
  text "2V5" at 7.01,1.168 h1 r90
  text "P11" at 44.679,1.092 h1 r90
  text "P15" at 34.442,0.991 h1 r90
  text "P13" at 39.726,0.991 h1 r90
  text "P10" at 47.346,0.991 h1 r90
  text "VBIA" at 9.576,0.965 h1 r90
  text "P12" at 42.113,0.94 h1 r90
  text "P06" at 52.426,0.914 h1 r90
  text "P07" at 49.987,0.889 h1 r90
  text "P04" at 57.709,0.889 h1 r90
  text "P14" at 36.932,0.864 h1 r90
  text "P05" at 54.966,0.838 h1 r90

## Text inside footprints (layer, text, board x,y; h text height)
P1: Top Overlay "2" at 5.156,12.725 h1.27 r90; Top Overlay "1" at 7.696,12.725 h1.27 r90